# EAGLE board FINAL8x64_LED_DIGITAL_DISPLAY_VERSION_1.0_CONNECTION_REMANING_v15 (EAGLE 9.7.0), part 1 of 2
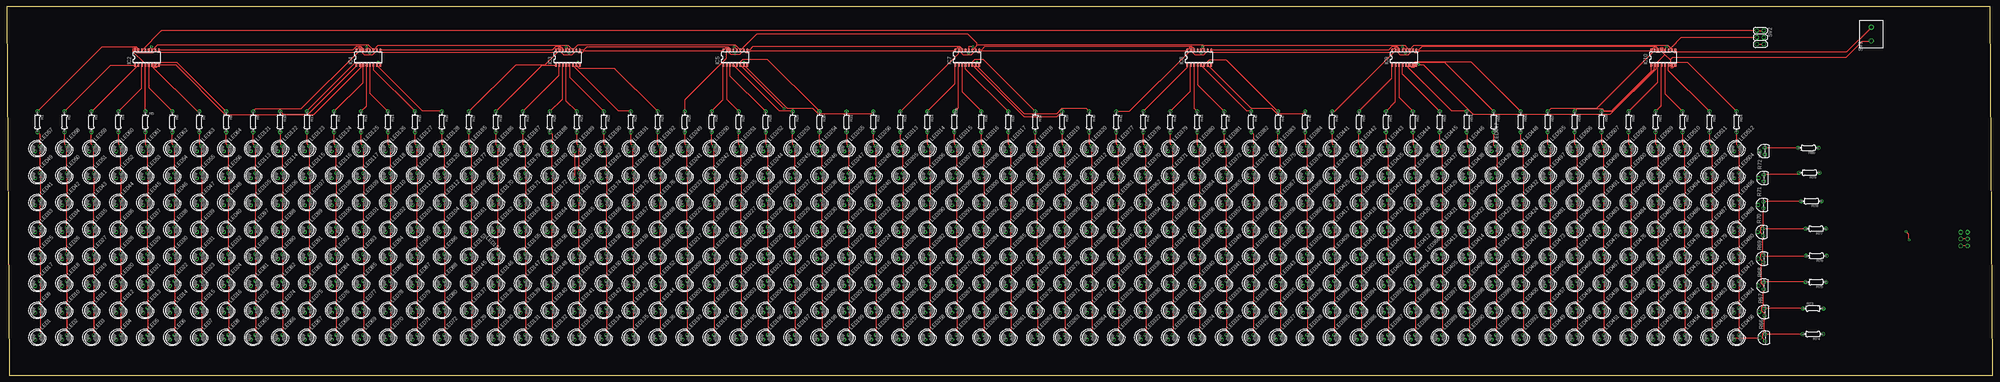
[diagram p0: board, top side]
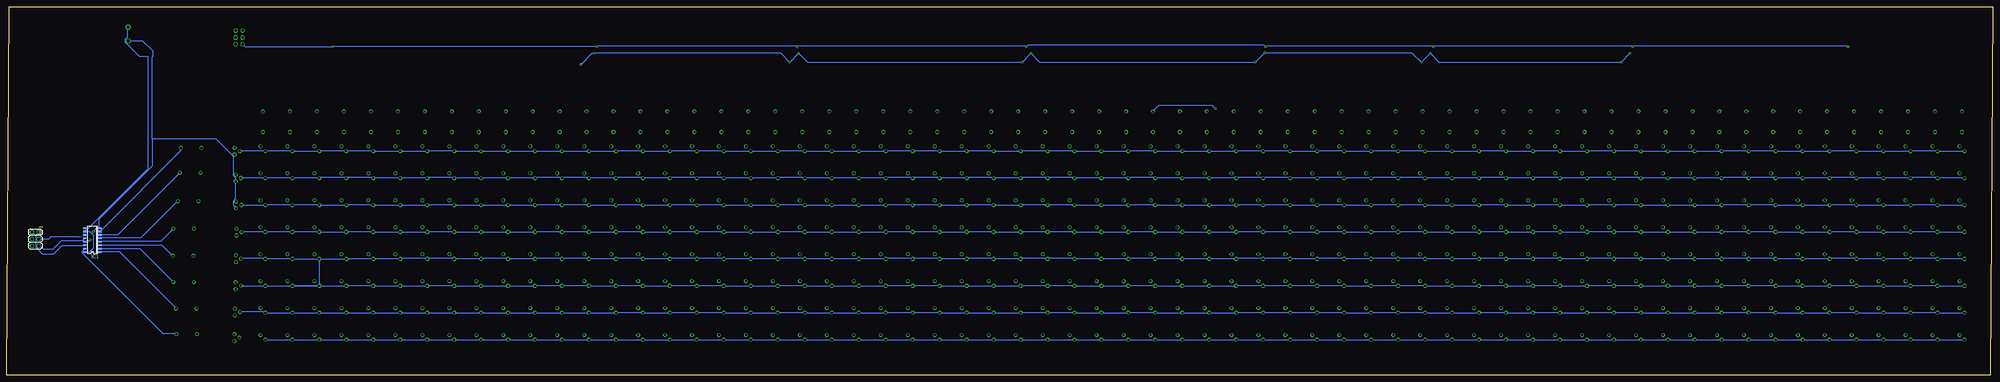
[diagram p1: board, bottom side, seen from below]

Size 736.38 x 136.7 mm. Coordinates in mm from the lower left corner, seen from the top.
Outline: 735.5,136.7 0,136.7 0.88,0 736.38,0 735.5,136.7
Copper layers (1*16): Top 0.035mm / dielectric 1.5mm / Bottom 0.035mm
Design rules "default *": minimum track width 6mil, minimum drill 0.35mm, track to track 6mil, track to pad 6mil, pad to pad 6mil, via to via 6mil, smd to smd 6mil, copper to edge 40mil, drill to drill 6mil, minimum pad ring 10mil, minimum via ring 8mil, stop-mask expansion 4mil, vias tented up to drill 0mil, thermal gap 10mil

## Footprints (pad centres in the part's own frame; a part is rotated, then mirrored left to right if it is on the bottom)
SO16 = smd 0.6 x 1.2: 1 -4.445,-2.8; 2 -3.175,-2.8; 3 -1.905,-2.8; 4 -0.635,-2.8; 5 0.635,-2.8; 6 1.905,-2.8; 7 3.175,-2.8; 8 4.445,-2.8; 9 4.445,2.8; 10 3.175,2.8; 11 1.905,2.8; 12 0.635,2.8; 13 -0.635,2.8; 14 -1.905,2.8; 15 -3.175,2.8; 16 -4.445,2.8
LED5MM = drill 0.813 octagon: A -1.27,0; K 1.27,0
0204/7 = drill 0.813 octagon: 1 -3.81,0; 2 3.81,0
TO92 = drill 0.813 octagon: 1 1.27,0; 2 0,1.905; 3 -1.27,0
2X03 = drill 1.016 octagon: 1 -2.54,-1.27; 2 -2.54,1.27; 3 0,-1.27; 4 0,1.27; 5 2.54,-1.27; 6 2.54,1.27
TERMBLK_508-2N = drill 1.2: 1 0,0; 2 5.08,0

## Placement (x,y rotation side)
IC1  74HC595  [SO16]  704.62,50.11 90 bottom
IC2  74HC595  [SO16]  52.01,117.81 0 top
IC3  74HC595  [SO16]  208.04,117.81 0 top
IC4  74HC595  [SO16]  134.07,117.81 0 top
IC5  74HC595  [SO16]  270.1,117.81 0 top
IC7  74HC595  [SO16]  356.13,117.81 0 top
IC8  74HC595  [SO16]  442.16,117.81 0 top
IC9  74HC595  [SO16]  518.19,117.81 0 top
IC10  74HC595  [SO16]  614.22,117.81 0 top
LED1  [LED5MM]  11.38,14 45 top
LED2  [LED5MM]  21.38,14 45 top
LED3  [LED5MM]  31.38,14 45 top
LED4  [LED5MM]  41.38,14 45 top
LED5  [LED5MM]  51.38,14 45 top
LED6  [LED5MM]  61.38,14 45 top
LED7  [LED5MM]  71.38,14 45 top
LED8  [LED5MM]  81.38,14 45 top
LED9  [LED5MM]  11.38,24 45 top
LED10  [LED5MM]  21.38,24 45 top
LED11  [LED5MM]  31.38,24 45 top
LED12  [LED5MM]  41.38,24 45 top
LED13  [LED5MM]  51.38,24 45 top
LED14  [LED5MM]  61.38,24 45 top
LED15  [LED5MM]  71.38,24 45 top
LED16  [LED5MM]  81.38,24 45 top
LED17  [LED5MM]  11.38,34 45 top
LED18  [LED5MM]  21.38,34 45 top
LED19  [LED5MM]  31.38,34 45 top
LED20  [LED5MM]  41.38,34 45 top
LED21  [LED5MM]  51.38,34 45 top
LED22  [LED5MM]  61.38,34 45 top
LED23  [LED5MM]  71.38,34 45 top
LED24  [LED5MM]  81.38,34 45 top
LED25  [LED5MM]  11.38,44 45 top
LED26  [LED5MM]  21.38,44 45 top
LED27  [LED5MM]  31.38,44 45 top
LED28  [LED5MM]  41.38,44 45 top
LED29  [LED5MM]  51.38,44 45 top
LED30  [LED5MM]  61.38,44 45 top
LED31  [LED5MM]  71.38,44 45 top
LED32  [LED5MM]  81.38,44 45 top
LED33  [LED5MM]  11.38,54 45 top
LED34  [LED5MM]  21.38,54 45 top
LED35  [LED5MM]  31.38,54 45 top
LED36  [LED5MM]  41.38,54 45 top
LED37  [LED5MM]  51.38,54 45 top
LED38  [LED5MM]  61.38,54 45 top
LED39  [LED5MM]  71.38,54 45 top
LED40  [LED5MM]  81.38,54 45 top
LED41  [LED5MM]  11.38,64 45 top
LED42  [LED5MM]  21.38,64 45 top
LED43  [LED5MM]  31.38,64 45 top
LED44  [LED5MM]  41.38,64 45 top
LED45  [LED5MM]  51.38,64 45 top
LED46  [LED5MM]  61.38,64 45 top
LED47  [LED5MM]  71.38,64 45 top
LED48  [LED5MM]  81.38,64 45 top
LED49  [LED5MM]  11.38,74 45 top
LED50  [LED5MM]  21.38,74 45 top
LED51  [LED5MM]  31.38,74 45 top
LED52  [LED5MM]  41.38,74 45 top
LED53  [LED5MM]  51.38,74 45 top
LED54  [LED5MM]  61.38,74 45 top
LED55  [LED5MM]  71.38,74 45 top
LED56  [LED5MM]  81.38,74 45 top
LED57  [LED5MM]  11.38,84 45 top
LED58  [LED5MM]  21.38,84 45 top
LED59  [LED5MM]  31.38,84 45 top
LED60  [LED5MM]  41.38,84 45 top
LED61  [LED5MM]  51.38,84 45 top
LED62  [LED5MM]  61.38,84 45 top
LED63  [LED5MM]  71.38,84 45 top
LED64  [LED5MM]  81.38,84 45 top
LED65  [LED5MM]  91.38,14 45 top
LED66  [LED5MM]  101.38,14 45 top
LED67  [LED5MM]  111.38,14 45 top
LED68  [LED5MM]  121.38,14 45 top
LED69  [LED5MM]  131.38,14 45 top
LED70  [LED5MM]  141.38,14 45 top
LED71  [LED5MM]  151.38,14 45 top
LED72  [LED5MM]  161.38,14 45 top
LED73  [LED5MM]  91.38,24 45 top
LED74  [LED5MM]  101.38,24 45 top
LED75  [LED5MM]  111.38,24 45 top
LED76  [LED5MM]  121.38,24 45 top
LED77  [LED5MM]  131.38,24 45 top
LED78  [LED5MM]  141.38,24 45 top
LED79  [LED5MM]  151.38,24 45 top
LED80  [LED5MM]  161.38,24 45 top
LED81  [LED5MM]  91.38,34 45 top
LED82  [LED5MM]  101.38,34 45 top
LED83  [LED5MM]  111.38,34 45 top
LED84  [LED5MM]  121.38,34 45 top
LED85  [LED5MM]  131.38,34 45 top
LED86  [LED5MM]  141.38,34 45 top
LED87  [LED5MM]  151.38,34 45 top
LED88  [LED5MM]  161.38,34 45 top
LED89  [LED5MM]  91.38,44 45 top
LED90  [LED5MM]  101.38,44 45 top
LED91  [LED5MM]  111.38,44 45 top
LED92  [LED5MM]  121.38,44 45 top
LED93  [LED5MM]  131.38,44 45 top
LED94  [LED5MM]  141.38,44 45 top
LED95  [LED5MM]  151.38,44 45 top
LED96  [LED5MM]  161.38,44 45 top
LED97  [LED5MM]  91.38,54 45 top
LED98  [LED5MM]  101.38,54 45 top
LED99  [LED5MM]  111.38,54 45 top
LED100  [LED5MM]  121.38,54 45 top
LED101  [LED5MM]  131.38,54 45 top
LED102  [LED5MM]  141.38,54 45 top
LED103  [LED5MM]  151.38,54 45 top
LED104  [LED5MM]  161.38,54 45 top
LED105  [LED5MM]  91.38,64 45 top
LED106  [LED5MM]  101.38,64 45 top
LED107  [LED5MM]  111.38,64 45 top
LED108  [LED5MM]  121.38,64 45 top
LED109  [LED5MM]  131.38,64 45 top
LED110  [LED5MM]  141.38,64 45 top
LED111  [LED5MM]  151.38,64 45 top
LED112  [LED5MM]  161.38,64 45 top
LED113  [LED5MM]  91.38,74 45 top
LED114  [LED5MM]  101.38,74 45 top
LED115  [LED5MM]  111.38,74 45 top
LED116  [LED5MM]  121.38,74 45 top
LED117  [LED5MM]  131.38,74 45 top
LED118  [LED5MM]  141.38,74 45 top
LED119  [LED5MM]  151.38,74 45 top
LED120  [LED5MM]  161.38,74 45 top
LED121  [LED5MM]  91.38,84 45 top
LED122  [LED5MM]  101.38,84 45 top
LED123  [LED5MM]  111.38,84 45 top
LED124  [LED5MM]  121.38,84 45 top
LED125  [LED5MM]  131.38,84 45 top
LED126  [LED5MM]  141.38,84 45 top
LED127  [LED5MM]  151.38,84 45 top
LED128  [LED5MM]  161.38,84 45 top
LED129  [LED5MM]  171.38,14 45 top
LED130  [LED5MM]  181.38,14 45 top
LED131  [LED5MM]  191.38,14 45 top
LED132  [LED5MM]  201.38,14 45 top
LED133  [LED5MM]  211.38,14 45 top
LED134  [LED5MM]  221.38,14 45 top
LED135  [LED5MM]  231.38,14 45 top
LED136  [LED5MM]  241.38,14 45 top
LED137  [LED5MM]  171.38,24 45 top
LED138  [LED5MM]  181.38,24 45 top
LED139  [LED5MM]  191.38,24 45 top
LED140  [LED5MM]  201.38,24 45 top
LED141  [LED5MM]  211.38,24 45 top
LED142  [LED5MM]  221.38,24 45 top
LED143  [LED5MM]  231.38,24 45 top
LED144  [LED5MM]  241.38,24 45 top
LED145  [LED5MM]  171.38,34 45 top
LED146  [LED5MM]  181.38,34 45 top
LED147  [LED5MM]  191.38,34 45 top
LED148  [LED5MM]  201.38,34 45 top
LED149  [LED5MM]  211.38,34 45 top
LED150  [LED5MM]  221.38,34 45 top
LED151  [LED5MM]  231.38,34 45 top
LED152  [LED5MM]  241.38,34 45 top
LED153  [LED5MM]  171.38,44 45 top
LED154  [LED5MM]  181.38,44 45 top
LED155  [LED5MM]  191.38,44 45 top
LED156  [LED5MM]  201.38,44 45 top
LED157  [LED5MM]  211.38,44 45 top
LED158  [LED5MM]  221.38,44 45 top
LED159  [LED5MM]  231.38,44 45 top
LED160  [LED5MM]  241.38,44 45 top
LED161  [LED5MM]  171.38,54 45 top
LED162  [LED5MM]  181.38,54 45 top
LED163  [LED5MM]  191.38,54 45 top
LED164  [LED5MM]  201.38,54 45 top
LED165  [LED5MM]  211.38,54 45 top
LED166  [LED5MM]  221.38,54 45 top
LED167  [LED5MM]  231.38,54 45 top
LED168  [LED5MM]  241.38,54 45 top
LED169  [LED5MM]  171.38,64 45 top
LED170  [LED5MM]  181.38,64 45 top
LED171  [LED5MM]  191.38,64 45 top
LED172  [LED5MM]  201.38,64 45 top
LED173  [LED5MM]  211.38,64 45 top
LED174  [LED5MM]  221.38,64 45 top
LED175  [LED5MM]  231.38,64 45 top
LED176  [LED5MM]  241.38,64 45 top
LED177  [LED5MM]  171.38,74 45 top
LED178  [LED5MM]  181.38,74 45 top
LED179  [LED5MM]  191.38,74 45 top
LED180  [LED5MM]  201.38,74 45 top
LED181  [LED5MM]  211.38,74 45 top
LED182  [LED5MM]  221.38,74 45 top
LED183  [LED5MM]  231.38,74 45 top
LED184  [LED5MM]  241.38,74 45 top
LED185  [LED5MM]  171.38,84 45 top
LED186  [LED5MM]  181.38,84 45 top
LED187  [LED5MM]  191.38,84 45 top
LED188  [LED5MM]  201.38,84 45 top
LED189  [LED5MM]  211.38,84 45 top
LED190  [LED5MM]  221.38,84 45 top
LED191  [LED5MM]  231.38,84 45 top
LED192  [LED5MM]  241.38,84 45 top
LED193  [LED5MM]  251.38,14 45 top
LED194  [LED5MM]  261.38,14 45 top
LED195  [LED5MM]  271.38,14 45 top
LED196  [LED5MM]  281.38,14 45 top
LED197  [LED5MM]  291.38,14 45 top
LED198  [LED5MM]  301.38,14 45 top
LED199  [LED5MM]  311.38,14 45 top
LED200  [LED5MM]  321.38,14 45 top
LED201  [LED5MM]  251.38,24 45 top
LED202  [LED5MM]  261.38,24 45 top
LED203  [LED5MM]  271.38,24 45 top
LED204  [LED5MM]  281.38,24 45 top
LED205  [LED5MM]  291.38,24 45 top
LED206  [LED5MM]  301.38,24 45 top
LED207  [LED5MM]  311.38,24 45 top
LED208  [LED5MM]  321.38,24 45 top
LED209  [LED5MM]  251.38,34 45 top
LED210  [LED5MM]  261.38,34 45 top
LED211  [LED5MM]  271.38,34 45 top
LED212  [LED5MM]  281.38,34 45 top
LED213  [LED5MM]  291.38,34 45 top
LED214  [LED5MM]  301.38,34 45 top
LED215  [LED5MM]  311.38,34 45 top
LED216  [LED5MM]  321.38,34 45 top
LED217  [LED5MM]  251.38,44 45 top
LED218  [LED5MM]  261.38,44 45 top
LED219  [LED5MM]  271.38,44 45 top
LED220  [LED5MM]  281.38,44 45 top
LED221  [LED5MM]  291.38,44 45 top
LED222  [LED5MM]  301.38,44 45 top
LED223  [LED5MM]  311.38,44 45 top
LED224  [LED5MM]  321.38,44 45 top
LED225  [LED5MM]  251.38,54 45 top
LED226  [LED5MM]  261.38,54 45 top
LED227  [LED5MM]  271.38,54 45 top
LED228  [LED5MM]  281.38,54 45 top
LED229  [LED5MM]  291.38,54 45 top
LED230  [LED5MM]  301.38,54 45 top
LED231  [LED5MM]  311.38,54 45 top
LED232  [LED5MM]  321.38,54 45 top
LED233  [LED5MM]  251.38,64 45 top
LED234  [LED5MM]  261.38,64 45 top
LED235  [LED5MM]  271.38,64 45 top
LED236  [LED5MM]  281.38,64 45 top
LED237  [LED5MM]  291.38,64 45 top
LED238  [LED5MM]  301.38,64 45 top
LED239  [LED5MM]  311.38,64 45 top
LED240  [LED5MM]  321.38,64 45 top
LED241  [LED5MM]  251.38,74 45 top
LED242  [LED5MM]  261.38,74 45 top
LED243  [LED5MM]  271.38,74 45 top
LED244  [LED5MM]  281.38,74 45 top
LED245  [LED5MM]  291.38,74 45 top
LED246  [LED5MM]  301.38,74 45 top
LED247  [LED5MM]  311.38,74 45 top
LED248  [LED5MM]  321.38,74 45 top
LED249  [LED5MM]  251.38,84 45 top
LED250  [LED5MM]  261.38,84 45 top
LED251  [LED5MM]  271.38,84 45 top
LED252  [LED5MM]  281.38,84 45 top
LED253  [LED5MM]  291.38,84 45 top
LED254  [LED5MM]  301.38,84 45 top
LED255  [LED5MM]  311.38,84 45 top
LED256  [LED5MM]  321.38,84 45 top
LED257  [LED5MM]  331.38,14 45 top
LED258  [LED5MM]  341.38,14 45 top
LED259  [LED5MM]  351.38,14 45 top
LED260  [LED5MM]  361.38,14 45 top
LED261  [LED5MM]  371.38,14 45 top
LED262  [LED5MM]  381.38,14 45 top
LED263  [LED5MM]  391.38,14 45 top
LED264  [LED5MM]  401.38,14 45 top
LED265  [LED5MM]  331.38,24 45 top
LED266  [LED5MM]  341.38,24 45 top
LED267  [LED5MM]  351.38,24 45 top
LED268  [LED5MM]  361.38,24 45 top
LED269  [LED5MM]  371.38,24 45 top
LED270  [LED5MM]  381.38,24 45 top
LED271  [LED5MM]  391.38,24 45 top
LED272  [LED5MM]  401.38,24 45 top
LED273  [LED5MM]  331.38,34 45 top
LED274  [LED5MM]  341.38,34 45 top
LED275  [LED5MM]  351.38,34 45 top
LED276  [LED5MM]  361.38,34 45 top
LED277  [LED5MM]  371.38,34 45 top
LED278  [LED5MM]  381.38,34 45 top
LED279  [LED5MM]  391.38,34 45 top
LED280  [LED5MM]  401.38,34 45 top
LED281  [LED5MM]  331.38,44 45 top
LED282  [LED5MM]  341.38,44 45 top
LED283  [LED5MM]  351.38,44 45 top
LED284  [LED5MM]  361.38,44 45 top
LED285  [LED5MM]  371.38,44 45 top
LED286  [LED5MM]  381.38,44 45 top
LED287  [LED5MM]  391.38,44 45 top
LED288  [LED5MM]  401.38,44 45 top
LED289  [LED5MM]  331.38,54 45 top
LED290  [LED5MM]  341.38,54 45 top
LED291  [LED5MM]  351.38,54 45 top
LED292  [LED5MM]  361.38,54 45 top
LED293  [LED5MM]  371.38,54 45 top
LED294  [LED5MM]  381.38,54 45 top
LED295  [LED5MM]  391.38,54 45 top
LED296  [LED5MM]  401.38,54 45 top
LED297  [LED5MM]  331.38,64 45 top
LED298  [LED5MM]  341.38,64 45 top
LED299  [LED5MM]  351.38,64 45 top
LED300  [LED5MM]  361.38,64 45 top
LED301  [LED5MM]  371.38,64 45 top
LED302  [LED5MM]  381.38,64 45 top
LED303  [LED5MM]  391.38,64 45 top
LED304  [LED5MM]  401.38,64 45 top
LED305  [LED5MM]  331.38,74 45 top
LED306  [LED5MM]  341.38,74 45 top
LED307  [LED5MM]  351.38,74 45 top
LED308  [LED5MM]  361.38,74 45 top
LED309  [LED5MM]  371.38,74 45 top
LED310  [LED5MM]  381.38,74 45 top
LED311  [LED5MM]  391.38,74 45 top
LED312  [LED5MM]  401.38,74 45 top
LED313  [LED5MM]  331.38,84 45 top
LED314  [LED5MM]  341.38,84 45 top
LED315  [LED5MM]  351.38,84 45 top
LED316  [LED5MM]  361.38,84 45 top
LED317  [LED5MM]  371.38,84 45 top
LED318  [LED5MM]  381.38,84 45 top
LED319  [LED5MM]  391.38,84 45 top
LED320  [LED5MM]  401.38,84 45 top
LED321  [LED5MM]  411.38,14 45 top
LED322  [LED5MM]  421.38,14 45 top
LED323  [LED5MM]  431.38,14 45 top
LED324  [LED5MM]  441.38,14 45 top
LED325  [LED5MM]  451.38,14 45 top
LED326  [LED5MM]  461.38,14 45 top
LED327  [LED5MM]  471.38,14 45 top
LED328  [LED5MM]  481.38,14 45 top
LED329  [LED5MM]  411.38,24 45 top
LED330  [LED5MM]  421.38,24 45 top
LED331  [LED5MM]  431.38,24 45 top
LED332  [LED5MM]  441.38,24 45 top
LED333  [LED5MM]  451.38,24 45 top
LED334  [LED5MM]  461.38,24 45 top
LED335  [LED5MM]  471.38,24 45 top
LED336  [LED5MM]  481.38,24 45 top
LED337  [LED5MM]  411.38,34 45 top
LED338  [LED5MM]  421.38,34 45 top
LED339  [LED5MM]  431.38,34 45 top
LED340  [LED5MM]  441.38,34 45 top
LED341  [LED5MM]  451.38,34 45 top
LED342  [LED5MM]  461.38,34 45 top
LED343  [LED5MM]  471.38,34 45 top
LED344  [LED5MM]  481.38,34 45 top
LED345  [LED5MM]  411.38,44 45 top
LED346  [LED5MM]  421.38,44 45 top
LED347  [LED5MM]  431.38,44 45 top
LED348  [LED5MM]  441.38,44 45 top
LED349  [LED5MM]  451.38,44 45 top
LED350  [LED5MM]  461.38,44 45 top
LED351  [LED5MM]  471.38,44 45 top
LED352  [LED5MM]  481.38,44 45 top
LED353  [LED5MM]  411.38,54 45 top
LED354  [LED5MM]  421.38,54 45 top
LED355  [LED5MM]  431.38,54 45 top
LED356  [LED5MM]  441.38,54 45 top
LED357  [LED5MM]  451.38,54 45 top
LED358  [LED5MM]  461.38,54 45 top
LED359  [LED5MM]  471.38,54 45 top
LED360  [LED5MM]  481.38,54 45 top
LED361  [LED5MM]  411.38,64 45 top
LED362  [LED5MM]  421.38,64 45 top
LED363  [LED5MM]  431.38,64 45 top
LED364  [LED5MM]  441.38,64 45 top
LED365  [LED5MM]  451.38,64 45 top
LED366  [LED5MM]  461.38,64 45 top
LED367  [LED5MM]  471.38,64 45 top
LED368  [LED5MM]  481.38,64 45 top
LED369  [LED5MM]  411.38,74 45 top
LED370  [LED5MM]  421.38,74 45 top
LED371  [LED5MM]  431.38,74 45 top
LED372  [LED5MM]  441.38,74 45 top
LED373  [LED5MM]  451.38,74 45 top
LED374  [LED5MM]  461.38,74 45 top
LED375  [LED5MM]  471.38,74 45 top
LED376  [LED5MM]  481.38,74 45 top
LED377  [LED5MM]  411.38,84 45 top
LED378  [LED5MM]  421.38,84 45 top
LED379  [LED5MM]  431.38,84 45 top
LED380  [LED5MM]  441.38,84 45 top
LED381  [LED5MM]  451.38,84 45 top
LED382  [LED5MM]  461.38,84 45 top
LED383  [LED5MM]  471.38,84 45 top
LED384  [LED5MM]  481.38,84 45 top
LED385  [LED5MM]  491.38,14 45 top
LED386  [LED5MM]  501.38,14 45 top
LED387  [LED5MM]  511.38,14 45 top
LED388  [LED5MM]  521.38,14 45 top
LED389  [LED5MM]  531.38,14 45 top
LED390  [LED5MM]  541.38,14 45 top
LED391  [LED5MM]  551.38,14 45 top
LED392  [LED5MM]  561.38,14 45 top
LED393  [LED5MM]  491.38,24 45 top
LED394  [LED5MM]  501.38,24 45 top
LED395  [LED5MM]  511.38,24 45 top
LED396  [LED5MM]  521.38,24 45 top
LED397  [LED5MM]  531.38,24 45 top
LED398  [LED5MM]  541.38,24 45 top
LED399  [LED5MM]  551.38,24 45 top
LED400  [LED5MM]  561.38,24 45 top
LED401  [LED5MM]  491.38,34 45 top
LED402  [LED5MM]  501.38,34 45 top
LED403  [LED5MM]  511.38,34 45 top
LED404  [LED5MM]  521.38,34 45 top
LED405  [LED5MM]  531.38,34 45 top
LED406  [LED5MM]  541.38,34 45 top
LED407  [LED5MM]  551.38,34 45 top
LED408  [LED5MM]  561.38,34 45 top
LED409  [LED5MM]  491.38,44 45 top
LED410  [LED5MM]  501.38,44 45 top
LED411  [LED5MM]  511.38,44 45 top
LED412  [LED5MM]  521.38,44 45 top
LED413  [LED5MM]  531.38,44 45 top
LED414  [LED5MM]  541.38,44 45 top
LED415  [LED5MM]  551.38,44 45 top
LED416  [LED5MM]  561.38,44 45 top
LED417  [LED5MM]  491.38,54 45 top
LED418  [LED5MM]  501.38,54 45 top
LED419  [LED5MM]  511.38,54 45 top
LED420  [LED5MM]  521.38,54 45 top
LED421  [LED5MM]  531.38,54 45 top
LED422  [LED5MM]  541.38,54 45 top
LED423  [LED5MM]  551.38,54 45 top
LED424  [LED5MM]  561.38,54 45 top
LED425  [LED5MM]  491.38,64 45 top
LED426  [LED5MM]  501.38,64 45 top
LED427  [LED5MM]  511.38,64 45 top
LED428  [LED5MM]  521.38,64 45 top
LED429  [LED5MM]  531.38,64 45 top
LED430  [LED5MM]  541.38,64 45 top
LED431  [LED5MM]  551.38,64 45 top
LED432  [LED5MM]  561.38,64 45 top
LED433  [LED5MM]  491.38,74 45 top
LED434  [LED5MM]  501.38,74 45 top
LED435  [LED5MM]  511.38,74 45 top
LED436  [LED5MM]  521.38,74 45 top
LED437  [LED5MM]  531.38,74 45 top
LED438  [LED5MM]  541.38,74 45 top
LED439  [LED5MM]  551.38,74 45 top
LED440  [LED5MM]  561.38,74 45 top
LED441  [LED5MM]  491.38,84 45 top
LED442  [LED5MM]  501.38,84 45 top
LED443  [LED5MM]  511.38,84 45 top
LED444  [LED5MM]  521.38,84 45 top
LED445  [LED5MM]  531.38,84 45 top
LED446  [LED5MM]  541.38,84 45 top
LED447  [LED5MM]  551.38,84 45 top
LED448  [LED5MM]  561.38,84 45 top
LED449  [LED5MM]  571.38,14 45 top
LED450  [LED5MM]  581.38,14 45 top
LED451  [LED5MM]  591.38,14 45 top
LED452  [LED5MM]  601.38,14 45 top
LED453  [LED5MM]  611.38,14 45 top
LED454  [LED5MM]  621.38,14 45 top
LED455  [LED5MM]  631.38,14 45 top
LED456  [LED5MM]  641.38,14 45 top
LED457  [LED5MM]  571.38,24 45 top
LED458  [LED5MM]  581.38,24 45 top
LED459  [LED5MM]  591.38,24 45 top
LED460  [LED5MM]  601.38,24 45 top
LED461  [LED5MM]  611.38,24 45 top
LED462  [LED5MM]  621.38,24 45 top
LED463  [LED5MM]  631.38,24 45 top
LED464  [LED5MM]  641.38,24 45 top
LED465  [LED5MM]  571.38,34 45 top
LED466  [LED5MM]  581.38,34 45 top
LED467  [LED5MM]  591.38,34 45 top
LED468  [LED5MM]  601.38,34 45 top
LED469  [LED5MM]  611.38,34 45 top
LED470  [LED5MM]  621.38,34 45 top
LED471  [LED5MM]  631.38,34 45 top
LED472  [LED5MM]  641.38,34 45 top
LED473  [LED5MM]  571.38,44 45 top
LED474  [LED5MM]  581.38,44 45 top
LED475  [LED5MM]  591.38,44 45 top
LED476  [LED5MM]  601.38,44 45 top
LED477  [LED5MM]  611.38,44 45 top
LED478  [LED5MM]  621.38,44 45 top
LED479  [LED5MM]  631.38,44 45 top
LED480  [LED5MM]  641.38,44 45 top
LED481  [LED5MM]  571.38,54 45 top
LED482  [LED5MM]  581.38,54 45 top
LED483  [LED5MM]  591.38,54 45 top
LED484  [LED5MM]  601.38,54 45 top
LED485  [LED5MM]  611.38,54 45 top
LED486  [LED5MM]  621.38,54 45 top
LED487  [LED5MM]  631.38,54 45 top
LED488  [LED5MM]  641.38,54 45 top
LED489  [LED5MM]  571.38,64 45 top
LED490  [LED5MM]  581.38,64 45 top
LED491  [LED5MM]  591.38,64 45 top
LED492  [LED5MM]  601.38,64 45 top
LED493  [LED5MM]  611.38,64 45 top
LED494  [LED5MM]  621.38,64 45 top
LED495  [LED5MM]  631.38,64 45 top
LED496  [LED5MM]  641.38,64 45 top
LED497  [LED5MM]  571.38,74 45 top
LED498  [LED5MM]  581.38,74 45 top
LED499  [LED5MM]  591.38,74 45 top
LED500  [LED5MM]  601.38,74 45 top
LED501  [LED5MM]  611.38,74 45 top
LED502  [LED5MM]  621.38,74 45 top
LED503  [LED5MM]  631.38,74 45 top
LED504  [LED5MM]  641.38,74 45 top
LED505  [LED5MM]  571.38,84 45 top
LED506  [LED5MM]  581.38,84 45 top
LED507  [LED5MM]  591.38,84 45 top
LED508  [LED5MM]  601.38,84 45 top
LED509  [LED5MM]  611.38,84 45 top
LED510  [LED5MM]  621.38,84 45 top
LED511  [LED5MM]  631.38,84 45 top
LED512  [LED5MM]  641.38,84 45 top
R1  [0204/7]  11.38,94 270 top
R2  [0204/7]  21.38,94 270 top
R3  [0204/7]  31.38,94 270 top
R4  [0204/7]  41.38,94 270 top
R5  [0204/7]  51.38,94 270 top
R6  [0204/7]  61.38,94 270 top
R7  [0204/7]  71.38,94 270 top
R8  [0204/7]  81.38,94 270 top
R9  [0204/7]  91.38,94 270 top
R10  [0204/7]  101.38,94 270 top
R11  [0204/7]  111.38,94 270 top
R12  [0204/7]  121.38,94 270 top
R13  [0204/7]  131.38,94 270 top
R14  [0204/7]  141.38,94 270 top
R15  [0204/7]  151.38,94 270 top
R16  [0204/7]  161.38,94 270 top
R17  [0204/7]  171.38,94 270 top
R18  [0204/7]  181.38,94 270 top
R19  [0204/7]  191.38,94 270 top
R20  [0204/7]  201.38,94 270 top
R21  [0204/7]  211.38,94 270 top
R22  [0204/7]  221.38,94 270 top
R23  [0204/7]  231.38,94 270 top
R24  [0204/7]  241.38,94 270 top
R25  [0204/7]  251.38,94 270 top
R26  [0204/7]  261.38,94 270 top
R27  [0204/7]  271.38,94 270 top
R28  [0204/7]  281.38,94 270 top
R29  [0204/7]  291.38,94 270 top
R30  [0204/7]  301.38,94 270 top
R31  [0204/7]  311.38,94 270 top
R32  [0204/7]  321.38,94 270 top
R33  [0204/7]  331.38,94 270 top
R34  [0204/7]  341.38,94 270 top
R35  [0204/7]  351.38,94 270 top
R36  [0204/7]  361.38,94 270 top
R37  [0204/7]  371.38,94 270 top
R38  [0204/7]  381.38,94 270 top
R39  [0204/7]  391.38,94 270 top
R40  [0204/7]  401.38,94 270 top
R41  [0204/7]  411.38,94 270 top
R42  [0204/7]  421.38,94 270 top
R43  [0204/7]  431.38,94 270 top
R44  [0204/7]  441.38,94 270 top
R45  [0204/7]  451.38,94 270 top
R46  [0204/7]  461.38,94 270 top
R47  [0204/7]  471.38,94 270 top
R48  [0204/7]  481.38,94 270 top
R49  [0204/7]  491.38,94 270 top
R50  [0204/7]  501.38,94 270 top
R51  [0204/7]  511.38,94 270 top
R52  [0204/7]  521.38,94 270 top
R53  [0204/7]  531.38,94 270 top
R54  [0204/7]  541.38,94 270 top
R55  [0204/7]  551.38,94 270 top
R56  [0204/7]  561.38,94 270 top
R57  [0204/7]  571.38,94 270 top
R58  [0204/7]  581.38,94 270 top
R59  [0204/7]  591.38,94 270 top
R60  [0204/7]  601.38,94 270 top
R61  [0204/7]  611.38,94 270 top
R62  [0204/7]  621.38,94 270 top
R63  [0204/7]  631.38,94 270 top
R64  [0204/7]  641.38,94 270 top
R65  2N3704  [TO92]  651.87,83.12 90 top
R66  2N3704  [TO92]  652.03,13.87 90 top
R67  2N3704  [TO92]  651.78,23.41 90 top
R68  2N3704  [TO92]  651.5,33.17 90 top
R69  2N3704  [TO92]  651.37,43.19 90 top
R70  2N3704  [TO92]  651.21,53.08 90 top
R71  2N3704  [TO92]  651.32,63.11 90 top
R72  2N3704  [TO92]  651.5,73.14 90 top
R73  [0204/7]  669.78,24.71 0 top
R74  [0204/7]  669.64,15.18 180 top
R75  [0204/7]  670.83,34.53 180 top
R76  [0204/7]  670.93,44.24 180 top
R77  [0204/7]  670.79,54.28 180 top
R78  [0204/7]  669.09,64.56 180 top
R79  [0204/7]  668.39,75.13 180 top
R80  [0204/7]  667.97,84.28 180 top
SV1  PINHD-2X3  [2X03]  725.79,50.48 270 bottom
SV2  PINHD-2X3  [2X03]  650.21,125.31 270 top
SV3  PINHD-2X3  [TERMBLK_508-2N]  691.38,124 90 top

## Library data of the parts
IC1-IC5 IC7-IC10 = 74HC595; AVAILABILITY: In Stock; DESCRIPTION: Shift Register Single 8-Bit Serial to Serial/Parallel 16-Pin SSOP T/R; MF: Nexperia; MP: 74HC595; PACKAGE: None; PRICE: None
LED1-LED512 = led
R1-R64 R73-R80 = rcl; SPICEPREFIX: R
R65-R72 = transistor
SV1 SV2 = Connector; CATEGORY: CONNECTOR; SUB-CATEGORY: PIN-HEADER
SV3 = Connector; CATEGORY: Connector; DESCRIPTION: 2 Position Wire to Board Terminal Block Horizontal with Board 5.08 mm Through Hole; MANUFACTURER: TE Connectivity; MPN: 282837-2; OPERATING_TEMPERATURE: -40°C to +105°C; PART_STATUS: ACTIVE; ROHS_COMPLIANCE: RoHS Compliant; SERIES: 282837; SUBCATEGORY: Terminal Block; TYPE: Side Wire Entry

## Nets
GND: IC1.8 IC1.13 IC2.8 IC2.13 IC3.8 IC3.13 IC4.8 IC4.13 IC5.8 IC5.13 IC7.8 IC7.13 IC8.8 IC8.13 IC9.8 IC9.13 IC10.8 IC10.13 R65.3 R66.3 R67.3 R68.3 R69.3 R70.3 R71.3 R72.3 SV3.1
N$1: R68.1 R75.2
N$2: LED9.A LED10.A LED11.A LED12.A LED13.A LED14.A LED15.A LED16.A LED73.A LED74.A LED75.A LED76.A LED77.A LED78.A LED79.A LED80.A LED137.A LED138.A LED139.A LED140.A LED141.A LED142.A LED143.A LED144.A LED201.A LED202.A LED203.A LED204.A LED205.A LED206.A LED207.A LED208.A LED265.A LED266.A LED267.A LED268.A LED269.A LED270.A LED271.A LED272.A LED329.A LED330.A LED331.A LED332.A LED333.A LED334.A LED335.A LED336.A LED393.A LED394.A LED395.A LED396.A LED397.A LED398.A LED399.A LED400.A LED457.A LED458.A LED459.A LED460.A LED461.A LED462.A LED463.A LED464.A R67.2
N$3: IC2.9 IC4.14
N$4: LED17.A LED18.A LED19.A LED20.A LED21.A LED22.A LED23.A LED24.A LED25.A LED26.A LED27.A LED28.A LED29.A LED30.A LED31.A LED32.A LED81.A LED82.A LED83.A LED84.A LED85.A LED86.A LED87.A LED88.A LED89.A LED90.A LED91.A LED92.A LED93.A LED94.A LED95.A LED96.A LED145.A LED146.A LED147.A LED148.A LED149.A LED150.A LED151.A LED152.A LED153.A LED154.A LED155.A LED156.A LED157.A LED158.A LED159.A LED160.A LED209.A LED210.A LED211.A LED212.A LED213.A LED214.A LED215.A LED216.A LED217.A LED218.A LED219.A LED220.A LED221.A LED222.A LED223.A LED224.A LED273.A LED274.A LED275.A LED276.A LED277.A LED278.A LED279.A LED280.A LED281.A LED282.A LED283.A LED284.A LED285.A LED286.A LED287.A LED288.A LED337.A LED338.A LED339.A LED340.A LED341.A LED342.A LED343.A LED344.A LED345.A LED346.A LED347.A LED348.A LED349.A LED350.A LED351.A LED352.A LED401.A LED402.A LED403.A LED404.A LED405.A LED406.A LED407.A LED408.A LED409.A LED410.A LED411.A LED412.A LED413.A LED414.A LED415.A LED416.A LED465.A LED466.A LED467.A LED468.A LED469.A LED470.A LED471.A LED472.A LED473.A LED474.A LED475.A LED476.A LED477.A LED478.A LED479.A LED480.A R68.2 R69.2
N$5: LED33.A LED34.A LED35.A LED36.A LED37.A LED38.A LED39.A LED40.A LED97.A LED98.A LED99.A LED100.A LED101.A LED102.A LED103.A LED104.A LED161.A LED162.A LED163.A LED164.A LED165.A LED166.A LED167.A LED168.A LED225.A LED226.A LED227.A LED228.A LED229.A LED230.A LED231.A LED232.A LED289.A LED290.A LED291.A LED292.A LED293.A LED294.A LED295.A LED296.A LED353.A LED354.A LED355.A LED356.A LED357.A LED358.A LED359.A LED360.A LED417.A LED418.A LED419.A LED420.A LED421.A LED422.A LED423.A LED424.A LED481.A LED482.A LED483.A LED484.A LED485.A LED486.A LED487.A LED488.A R70.2
N$6: IC1.15 R74.1
N$7: IC3.9 IC5.14
N$8: IC1.1 R73.2
N$9: LED1.A LED2.A LED3.A LED4.A LED5.A LED6.A LED7.A LED8.A LED65.A LED66.A LED67.A LED68.A LED69.A LED70.A LED71.A LED72.A LED129.A LED130.A LED131.A LED132.A LED133.A LED134.A LED135.A LED136.A LED193.A LED194.A LED195.A LED196.A LED197.A LED198.A LED199.A LED200.A LED257.A LED258.A LED259.A LED260.A LED261.A LED262.A LED263.A LED264.A LED321.A LED322.A LED323.A LED324.A LED325.A LED326.A LED327.A LED328.A LED385.A LED386.A LED387.A LED388.A LED389.A LED390.A LED391.A LED392.A LED449.A LED450.A LED451.A LED452.A LED453.A LED454.A LED455.A LED456.A R66.2
N$10: LED3.K LED11.K LED19.K LED27.K LED35.K LED43.K LED51.K LED59.K R3.2
N$11: LED4.K LED12.K LED20.K LED28.K LED36.K LED44.K LED52.K LED60.K R4.2
N$12: LED2.K LED10.K LED18.K LED26.K LED34.K LED42.K LED50.K LED58.K R2.2
N$13: LED5.K LED13.K LED21.K LED29.K LED37.K LED45.K LED53.K LED61.K R5.2
N$14: LED6.K LED14.K LED22.K LED30.K LED38.K LED46.K LED54.K LED62.K R6.2
N$15: LED7.K LED15.K LED23.K LED31.K LED39.K LED47.K LED55.K LED63.K R7.2
N$16: LED8.K LED16.K LED24.K LED32.K LED40.K LED48.K LED56.K LED64.K R8.2
N$17: IC2.15 R1.1
N$18: IC2.1 R2.1
N$19: IC2.2 R3.1
N$20: IC2.3 R4.1
N$21: IC2.4 R5.1
N$22: IC2.5 R6.1
N$23: IC2.6 R7.1
N$24: IC2.7 R8.1
N$25: IC2.14 SV2.1 SV2.2
N$26: IC2.11 IC3.11 IC4.11 IC5.11 IC7.11 IC8.11 IC9.11 IC10.11 SV2.3
N$28: IC5.9 IC7.14
N$29: SV2.4
N$31: IC1.11 SV1.3 SV1.4
N$32: LED1.K LED9.K LED17.K LED25.K LED33.K LED41.K LED49.K LED57.K R1.2
N$33: IC1.12 SV1.5 SV1.6
N$34: IC2.12 IC3.12 IC4.12 IC5.12 IC7.12 IC8.12 IC9.12 IC10.12 SV2.5 SV2.6
N$36: IC1.3 R76.1
N$37: R66.1 R74.2
N$38: R71.1 R78.2
N$39: LED41.A LED42.A LED43.A LED44.A LED45.A LED46.A LED47.A LED48.A LED105.A LED106.A LED107.A LED108.A LED109.A LED110.A LED111.A LED112.A LED169.A LED170.A LED171.A LED172.A LED173.A LED174.A LED175.A LED176.A LED233.A LED234.A LED235.A LED236.A LED237.A LED238.A LED239.A LED240.A LED297.A LED298.A LED299.A LED300.A LED301.A LED302.A LED303.A LED304.A LED361.A LED362.A LED363.A LED364.A LED365.A LED366.A LED367.A LED368.A LED425.A LED426.A LED427.A LED428.A LED429.A LED430.A LED431.A LED432.A LED489.A LED490.A LED491.A LED492.A LED493.A LED494.A LED495.A LED496.A R71.2
N$40: LED49.A LED50.A LED51.A LED52.A LED53.A LED54.A LED55.A LED56.A LED57.A LED58.A LED59.A LED60.A LED61.A LED62.A LED63.A LED64.A LED113.A LED114.A LED115.A LED116.A LED117.A LED118.A LED119.A LED120.A LED121.A LED122.A LED123.A LED124.A LED125.A LED126.A LED127.A LED128.A LED177.A LED178.A LED179.A LED180.A LED181.A LED182.A LED183.A LED184.A LED185.A LED186.A LED187.A LED188.A LED189.A LED190.A LED191.A LED192.A LED241.A LED242.A LED243.A LED244.A LED245.A LED246.A LED247.A LED248.A LED249.A LED250.A LED251.A LED252.A LED253.A LED254.A LED255.A LED256.A LED305.A LED306.A LED307.A LED308.A LED309.A LED310.A LED311.A LED312.A LED313.A LED314.A LED315.A LED316.A LED317.A LED318.A LED319.A LED320.A LED369.A LED370.A LED371.A LED372.A LED373.A LED374.A LED375.A LED376.A LED377.A LED378.A LED379.A LED380.A LED381.A LED382.A LED383.A LED384.A LED433.A LED434.A LED435.A LED436.A LED437.A LED438.A LED439.A LED440.A LED441.A LED442.A LED443.A LED444.A LED445.A LED446.A LED447.A LED448.A LED497.A LED498.A LED499.A LED500.A LED501.A LED502.A LED503.A LED504.A LED505.A LED506.A LED507.A LED508.A LED509.A LED510.A LED511.A LED512.A R65.2 R72.2
N$41: LED257.K LED265.K LED273.K LED281.K LED289.K LED297.K LED305.K LED313.K R33.2
N$42: LED65.K LED73.K LED81.K LED89.K LED97.K LED105.K LED113.K LED121.K R9.2
N$43: LED194.K LED202.K LED210.K LED218.K LED226.K LED234.K LED242.K LED250.K R26.2
N$44: LED67.K LED75.K LED83.K LED91.K LED99.K LED107.K LED115.K LED123.K R11.2
N$45: LED68.K LED76.K LED84.K LED92.K LED100.K LED108.K LED116.K LED124.K R12.2
N$46: LED69.K LED77.K LED85.K LED93.K LED101.K LED109.K LED117.K LED125.K R13.2
N$47: LED70.K LED78.K LED86.K LED94.K LED102.K LED110.K LED118.K LED126.K R14.2
N$48: LED71.K LED79.K LED87.K LED95.K LED103.K LED111.K LED119.K LED127.K R15.2
N$49: LED72.K LED80.K LED88.K LED96.K LED104.K LED112.K LED120.K LED128.K R16.2
N$50: IC4.15 R9.1
N$51: IC4.1 R10.1
N$52: IC4.2 R11.1
N$53: IC4.3 R12.1
N$54: IC4.4 R13.1
N$55: IC4.5 R14.1
N$56: IC4.6 R15.1
N$57: IC4.7 R16.1
N$58: IC7.9 IC8.14
N$62: IC1.2 R75.1
N$63: LED258.K LED266.K LED274.K LED282.K LED290.K LED298.K LED306.K LED314.K R34.2
N$66: IC3.14 IC4.9
N$68: LED66.K LED74.K LED82.K LED90.K LED98.K LED106.K LED114.K LED122.K R10.2
N$69: LED259.K LED267.K LED275.K LED283.K LED291.K LED299.K LED307.K LED315.K R35.2
N$70: LED260.K LED268.K LED276.K LED284.K LED292.K LED300.K LED308.K LED316.K R36.2
N$71: LED261.K LED269.K LED277.K LED285.K LED293.K LED301.K LED309.K LED317.K R37.2
N$72: LED262.K LED270.K LED278.K LED286.K LED294.K LED302.K LED310.K LED318.K R38.2
N$73: LED263.K LED271.K LED279.K LED287.K LED295.K LED303.K LED311.K LED319.K R39.2
N$74: LED129.K LED137.K LED145.K LED153.K LED161.K LED169.K LED177.K LED185.K R17.2
N$75: LED130.K LED138.K LED146.K LED154.K LED162.K LED170.K LED178.K LED186.K R18.2
N$76: LED131.K LED139.K LED147.K LED155.K LED163.K LED171.K LED179.K LED187.K R19.2
N$77: LED132.K LED140.K LED148.K LED156.K LED164.K LED172.K LED180.K LED188.K R20.2
N$78: LED133.K LED141.K LED149.K LED157.K LED165.K LED173.K LED181.K LED189.K R21.2
N$79: LED134.K LED142.K LED150.K LED158.K LED166.K LED174.K LED182.K LED190.K R22.2
N$80: LED135.K LED143.K LED151.K LED159.K LED167.K LED175.K LED183.K LED191.K R23.2
N$81: LED136.K LED144.K LED152.K LED160.K LED168.K LED176.K LED184.K LED192.K R24.2
N$82: IC3.15 R17.1
N$83: IC3.1 R18.1
N$84: IC3.2 R19.1
N$85: IC3.3 R20.1
N$86: IC3.4 R21.1
N$87: IC3.5 R22.1
N$88: IC3.6 R23.1
N$89: IC3.7 R24.1
N$90: IC8.9 IC9.14
N$92: IC1.14 SV1.1 SV1.2
N$93: IC9.9 IC10.14
N$97: LED193.K LED201.K LED209.K LED217.K LED225.K LED233.K LED241.K LED249.K R25.2
N$98: LED264.K LED272.K LED280.K LED288.K LED296.K LED304.K LED312.K LED320.K R40.2
N$99: LED195.K LED203.K LED211.K LED219.K LED227.K LED235.K LED243.K LED251.K R27.2
N$100: LED196.K LED204.K LED212.K LED220.K LED228.K LED236.K LED244.K LED252.K R28.2
N$101: LED197.K LED205.K LED213.K LED221.K LED229.K LED237.K LED245.K LED253.K R29.2
N$102: LED198.K LED206.K LED214.K LED222.K LED230.K LED238.K LED246.K LED254.K R30.2
N$103: LED199.K LED207.K LED215.K LED223.K LED231.K LED239.K LED247.K LED255.K R31.2
N$104: LED200.K LED208.K LED216.K LED224.K LED232.K LED240.K LED248.K LED256.K R32.2
N$105: IC5.15 R25.1
N$106: IC5.1 R26.1
N$107: IC5.2 R27.1
N$108: IC5.3 R28.1
N$109: IC5.4 R29.1
N$110: IC5.5 R30.1
N$111: IC5.6 R31.1
N$112: IC5.7 R32.1
N$120: IC7.15 R33.1
N$121: IC7.1 R34.1
N$122: IC7.2 R35.1
N$123: IC7.3 R36.1
N$124: IC7.4 R37.1
N$125: IC7.5 R38.1
N$126: IC7.6 R39.1
N$127: IC7.7 R40.1
N$128: R67.1 R73.1
N$129: R69.1 R76.2
N$131: R70.1 R77.2
N$132: IC1.4 R77.1
N$133: IC1.5 R78.1
N$137: LED321.K LED329.K LED337.K LED345.K LED353.K LED361.K LED369.K LED377.K R41.2
N$138: LED323.K LED331.K LED339.K LED347.K LED355.K LED363.K LED371.K LED379.K R43.2
N$139: LED324.K LED332.K LED340.K LED348.K LED356.K LED364.K LED372.K LED380.K R44.2
N$140: LED325.K LED333.K LED341.K LED349.K LED357.K LED365.K LED373.K LED381.K R45.2
N$141: LED326.K LED334.K LED342.K LED350.K LED358.K LED366.K LED374.K LED382.K R46.2
N$142: LED327.K LED335.K LED343.K LED351.K LED359.K LED367.K LED375.K LED383.K R47.2
N$143: LED328.K LED336.K LED344.K LED352.K LED360.K LED368.K LED376.K LED384.K R48.2
N$144: IC8.15 R41.1
N$145: IC8.1 R42.1
N$146: IC8.2 R43.1
N$147: IC8.3 R44.1
N$148: IC8.4 R45.1
N$149: IC8.5 R46.1
N$150: IC8.6 R47.1
N$151: IC8.7 R48.1
N$159: IC1.6 R79.1
N$160: LED385.K LED393.K LED401.K LED409.K LED417.K LED425.K LED433.K LED441.K R49.2
N$161: LED386.K LED394.K LED402.K LED410.K LED418.K LED426.K LED434.K LED442.K R50.2
N$162: LED387.K LED395.K LED403.K LED411.K LED419.K LED427.K LED435.K LED443.K R51.2
N$163: LED388.K LED396.K LED404.K LED412.K LED420.K LED428.K LED436.K LED444.K R52.2
N$164: LED389.K LED397.K LED405.K LED413.K LED421.K LED429.K LED437.K LED445.K R53.2
N$165: LED390.K LED398.K LED406.K LED414.K LED422.K LED430.K LED438.K LED446.K R54.2
N$166: LED391.K LED399.K LED407.K LED415.K LED423.K LED431.K LED439.K LED447.K R55.2
N$167: LED392.K LED400.K LED408.K LED416.K LED424.K LED432.K LED440.K LED448.K R56.2
N$168: IC9.15 R49.1
N$169: IC9.1 R50.1
N$170: IC9.2 R51.1
N$171: IC9.3 R52.1
N$172: IC9.4 R53.1
N$173: IC9.5 R54.1
N$174: IC9.6 R55.1
N$175: IC9.7 R56.1
N$183: R72.1 R79.2
N$184: LED449.K LED457.K LED465.K LED473.K LED481.K LED489.K LED497.K LED505.K R57.2
N$185: LED451.K LED459.K LED467.K LED475.K LED483.K LED491.K LED499.K LED507.K R59.2
N$186: LED452.K LED460.K LED468.K LED476.K LED484.K LED492.K LED500.K LED508.K R60.2
N$187: LED453.K LED461.K LED469.K LED477.K LED485.K LED493.K LED501.K LED509.K R61.2
N$188: LED454.K LED462.K LED470.K LED478.K LED486.K LED494.K LED502.K LED510.K R62.2
N$189: LED455.K LED463.K LED471.K LED479.K LED487.K LED495.K LED503.K LED511.K R63.2
N$190: LED456.K LED464.K LED472.K LED480.K LED488.K LED496.K LED504.K LED512.K R64.2
N$191: IC10.15 R57.1
N$192: IC10.1 R58.1
N$193: IC10.2 R59.1
N$194: IC10.3 R60.1
N$195: IC10.4 R61.1
N$196: IC10.5 R62.1
N$197: IC10.6 R63.1
N$198: IC10.7 R64.1
N$207: LED322.K LED330.K LED338.K LED346.K LED354.K LED362.K LED370.K LED378.K R42.2
N$208: LED450.K LED458.K LED466.K LED474.K LED482.K LED490.K LED498.K LED506.K R58.2
N$209: IC1.7 R80.1
N$210: R65.1 R80.2
VCC: IC1.10 IC1.16 IC2.10 IC2.16 IC3.10 IC3.16 IC4.10 IC4.16 IC5.10 IC5.16 IC7.10 IC7.16 IC8.10 IC8.16 IC9.10 IC9.16 IC10.10 IC10.16 SV3.2